# Altium PCB Head.PcbDoc
Units mm, origin at the board's own origin, x right, y up, seen from the top; angles counter-clockwise.
Board outline 61.39 x 20 mm, 2 copper layers (Top Layer, Bottom Layer); 27 components, 22 nets, 88 pads, 44 vias.
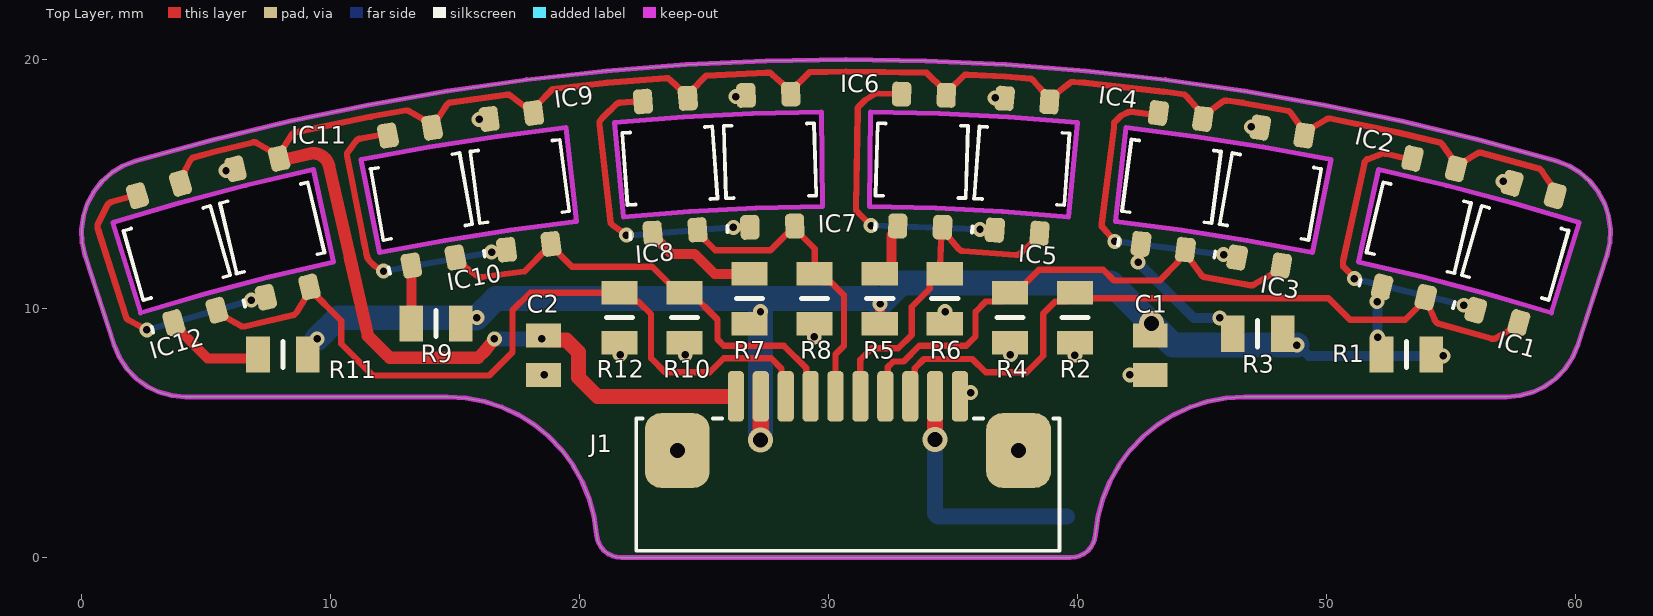
[diagram p0: Top Layer view]
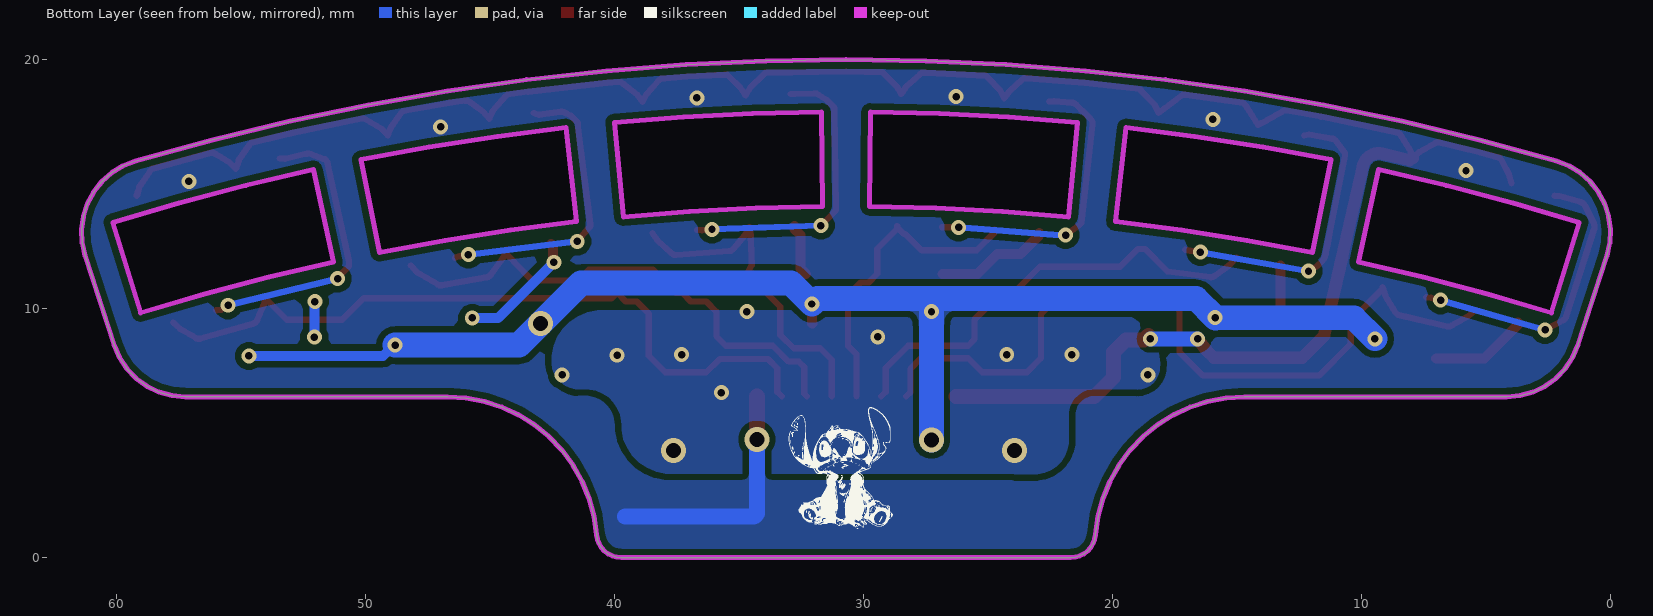
[diagram p1: Bottom Layer view, seen from below]
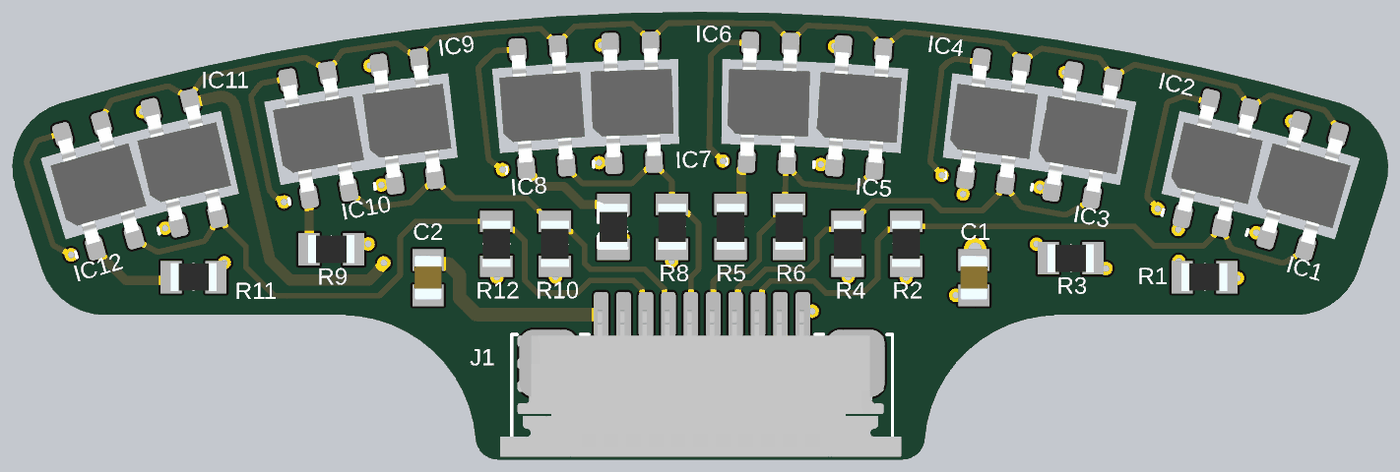
[diagram p2: 3D render of the assembled board from above, using the file's embedded part models]

## Layer stack, top to bottom
Top Solder: solder mask 0.0102, Solder Resist, Dk 3.5
Top Layer: signal copper 0.0356
Dielectric 1: dielectric 0.32, FR-4, Dk 4.8
Bottom Layer: signal copper 0.0356
Bottom Solder: solder mask 0.0102, Solder Resist, Dk 3.5

## Board outline
39.708,0 39.894,0.017 40.073,0.069 40.239,0.153 40.387,0.266 40.512,0.405 40.608,0.564 40.673,0.739 40.705,0.922 40.809,1.661 41.004,2.381 41.287,3.072 41.653,3.722 42.097,4.321 42.612,4.861 43.19,5.332 43.823,5.729 44.499,6.043 45.209,6.272 45.942,6.41 46.687,6.457 57.22,6.457 57.755,6.505 58.274,6.648 58.759,6.881 59.194,7.198 59.565,7.587 59.862,8.036 60.073,8.53 61.238,12.12 61.357,12.64 61.382,13.172 61.313,13.701 61.151,14.208 60.901,14.68 60.573,15.099 60.175,15.454 59.721,15.733 59.224,15.927 56.125,16.777 53.001,17.529 49.854,18.183 46.689,18.737 43.508,19.191 40.314,19.545 37.11,19.798 33.9,19.949 30.687,20 27.474,19.949 24.264,19.798 21.06,19.545 17.866,19.191 14.685,18.737 11.519,18.183 8.373,17.529 5.249,16.777 2.15,15.927 1.653,15.733 1.199,15.454 0.801,15.099 0.473,14.68 0.223,14.208 0.061,13.701 -0.008,13.172 0.017,12.64 0.136,12.12 1.301,8.53 1.512,8.036 1.808,7.587 2.18,7.198 2.615,6.881 3.1,6.648 3.619,6.505 4.154,6.457 14.687,6.457 15.432,6.41 16.165,6.272 16.875,6.043 17.551,5.729 18.184,5.332 18.762,4.861 19.277,4.321 19.721,3.722 20.087,3.072 20.37,2.381 20.565,1.661 20.669,0.922 20.701,0.739 20.766,0.564 20.862,0.405 20.987,0.266 21.135,0.153 21.301,0.069 21.48,0.017 21.666,0
cut-out: 11.955,12.257 11.214,15.984 13.945,16.487 16.689,16.914 19.444,17.265 19.872,13.489 17.222,13.152 14.582,12.741
cut-out: 29.708,17.895 29.746,14.095 27.075,14.032 24.407,13.895 21.744,13.683 21.391,17.467 24.159,17.686 26.932,17.829
cut-out: 10.112,11.872 7.511,11.263 4.927,10.583 2.363,9.831 1.243,13.462 3.908,14.244 6.594,14.951 9.299,15.584
cut-out: 59.011,9.831 56.447,10.583 53.863,11.263 51.262,11.872 52.075,15.584 54.78,14.951 57.465,14.244 60.131,13.462
cut-out: 31.628,14.095 31.666,17.895 34.442,17.829 37.215,17.686 39.983,17.467 39.63,13.683 36.967,13.895 34.299,14.032
cut-out: 50.16,15.984 49.419,12.257 46.792,12.741 44.152,13.152 41.502,13.489 41.93,17.265 44.685,16.914 47.429,16.487

## Design rules (kind name [scope] priority, off if disabled: settings)
Clearance Clearance_Sensors [InComponentClass('HeadSensors')] p1: gap=0.2 ignorepadtopadclearanceinfootprint=FALSE except(0.05: Arc-SMDPad Track-SMDPad)
Clearance [All] p2: gap=0.254 ignorepadtopadclearanceinfootprint=FALSE
PolygonConnect 5v [All vs IsNamedPolygon('NONET_L02_P001')] p1: thpad.connectstyle=Direct thpad.reliefconductorwidth=0.254 thpad.reliefentries=4 thpad.polygonreliefangle="90 Angle" thpad.airgapwidth=0.254 smdpad.connectstyle=Direct smdpad.reliefconductorwidth=0.254 smdpad.reliefentries=4 smdpad.polygonreliefangle="90 Angle" smdpad.airgapwidth=0.254 via.connectstyle=Relief via.reliefconductorwidth=0.254 via.reliefentries=4 via.polygonreliefangle="90 Angle" via.airgapwidth=0.254
PolygonConnect [All] p2: connectstyle=Direct reliefconductorwidth=0.254 reliefentries=4 polygonreliefangle="90 Angle" airgapwidth=0.254
RoutingVias [All] p1: holewidth=0.3 width=0.6 viastyle="Through Hole" minholewidth=0.3 minwidth=0.6 maxholewidth=0.711 maxwidth=1.27
SolderMaskExpansion [All] p1: expansion=0.102 istentingtop=FALSE
SupplyNets "Schematic Supply Nets_2" [InNet('3V3')] p1: voltage=0.000
SupplyNets "Schematic Supply Nets_1" [InNet('5V')] p2: voltage=0.000
SupplyNets "Schematic Supply Nets" [InNet('GND')] p3: voltage=0.000
Width [All] p1: maxlimit=1 minlimit=0.254 preferedwidth=0.254
30 further rules are at their usual default settings.

## Classes and differential pairs
component class HeadSensors: IC1 IC2 IC3 IC4 IC5 IC6 IC7 IC8 IC9 IC10 IC11 IC12

## Components (designator, comment, footprint, x,y, rotation, side; value= is the part's Value field where it differs from the comment)
C1 "CC0805KRX7R9BB104" CAP0805 42.901,8.128 r270 top value=100nF
C2 "CC0805KRX7R9BB104" CAP0805 18.542,8.128 r270 top value=100nF
IC1 "QRE1113GR" "SOIC4- HEAD" 57.57,12.235 r164 top locked
IC2 "QRE1113GR" "SOIC4- HEAD" 53.7,13.243 r166.7 top locked
IC3 "QRE1113GR" "SOIC4- HEAD" 47.74,14.5 r169.9 top locked
IC4 "QRE1113GR" "SOIC4- HEAD" 43.77,15.11 r172.4 top locked
IC5 "QRE1113GR" "SOIC4- HEAD" 37.76,15.73 r175.7 top locked
IC6 "QRE1113GR" "SOIC4- HEAD" 33.74,15.94 r178.3 top locked
IC7 "QRE1113GR" "SOIC4- HEAD" 27.65,15.94 r181.7 top locked
IC8 "QRE1113GR" "SOIC4- HEAD" 23.63,15.74 r184.2 top locked
IC9 "QRE1113GR" "SOIC4- HEAD" 17.6,15.11 r187.6 top locked
IC10 "QRE1113GR" "SOIC4- HEAD" 13.65,14.5 r190.2 top locked
IC11 "QRE1113GR" "SOIC4- HEAD" 7.659,13.243 r193.3 top locked
IC12 "QRE1113GR" "SOIC4- HEAD" 3.83,12.235 r196 top locked
J1 "AFA07-S10ECA-00" FPC-SMD-P1.00-10P_LCS-SJ-H2.5 30.766,5.588 r180 top locked
R1 "0805W8F1000T5E" RES0805 53.188,8.153 r180 top value=100Ω
R2 "0805W8F3301T5E" RES0805 39.878,9.636 r270 top value=3.3kΩ
R3 "0805W8F1000T5E" RES0805 47.219,8.992 r180 top value=100Ω
R4 "0805W8F3301T5E" RES0805 37.265,9.636 r270 top value=3.3kΩ
R5 "0805W8F1000T5E" RES0805 32.04,10.398 r90 top value=100Ω
R6 "0805W8F3301T5E" RES0805 34.653,10.398 r270 top value=3.3kΩ
R7 "0805W8F1000T5E" RES0805 26.815,10.398 r90 top value=100Ω
R8 "0805W8F3301T5E" RES0805 29.428,10.398 r270 top value=3.3kΩ
R9 "0805W8F1000T5E" RES0805 14.224,9.398 r180 top value=100Ω
R10 "0805W8F3301T5E" RES0805 24.203,9.636 r270 top value=3.3kΩ
R11 "0805W8F1000T5E" RES0805 8.077,8.153 r180 top value=100Ω
R12 "0805W8F3301T5E" RES0805 21.59,9.636 r270 top value=3.3kΩ

## Footprints (in the part's own frame and the unit in brackets; to place one, negate y for a bottom-side part, rotate by r counter-clockwise, add the part's x,y. Pads: shape width x height; smd on the part's side, far side on the other; paste and mask are expansions set on the pad)
CAP0805 [mm]
  rect 0.96x1.39 smd: 1(-0.79,0) 2(0.79,0)
  body extent -1,-0.63 1,0.63, height 0.95
FPC-SMD-P1.00-10P_LCS-SJ-H2.5 [mm] "Drawer Type 10P Contact,Top Horizontal attachment 1mm SMD,P=1mm,Surface Mount，Right Angle FFC, FPC (Flat Flexible) Connector Assemblies ROHS"
  rrect49% 0.65x2.032 smd: 1(-4.5,-0.889) 2(-3.5,-0.889) 3(-2.5,-0.889) 4(-1.5,-0.889) 5(-0.5,-0.889) 6(0.5,-0.889) 7(1.5,-0.889) 8(2.5,-0.889) 9(3.5,-0.889) 10(4.5,-0.889)
  rrect49% 2.601x3 smd: 11(-6.85,1.285) 12(6.85,1.285)
  silkscreen extent -8.5,0 8.5,5.31, body extent -8.89,-1.09 9.02,5.46, height 2.36
RES0805 [mm]
  rect 0.95x1.45 smd: 1(-1,0) 2(1,0)
  silkscreen extent 0,-0.53 0,0.53, body extent -1.02,-0.63 1.02,0.63, height 0.5
"SOIC4- HEAD" [mm] "Small Outline IC (SOIC), 1.80 mm pitch; 4 pin, 3.40 mm L X 2.70 mm W X 1.70 mm H body"
  rrect49% 0.77x1 smd: 1(0.9,2.65) 2(0.9,-2.65) 3(-0.9,-2.65) 4(-0.9,2.65)
  silkscreen extent -1.8,-1.45 1.82,2.82, body extent -1.8,-2.4 1.8,2.4, height 0.15

## Part data
C1 C2: "Multilayer Ceramic Capacitors MLCC - SMD/SMT 50 V 0.1uF X7R 0805 10%", LCSC=C49678, Manufacturer_Name=YAGEO, Datasheet Link=https://www.yageo.com/upload/media/product/productsearch/datasheet/mlcc/UPY-GPHC_X7R_6.3V-to-50V_20.pdf, Geometry.Height=0.95mm, Manufacturer_Part_Number=CC0805KRX7R9BB104
IC1 IC2 IC3 IC4 IC5 IC6 IC7 IC8 IC9 IC10 IC11 IC12: library part QRE1113GR_H, "IC IR-SENSOR", Ic - Collector Current Max=20mA, If - Forward Current Max=50mA, Manufacturer="ON Semiconductor", Operating Temperature="-25°C ~ 85°C", Package / Case="SMD-4 Gull Wing", Pd - Power Dissipation=75mW, Supplier Part Number 1=512-QRE1113GR, Vce - Collector/Emitter Voltage Max=30V, Vf - Forward Voltage=1.4V, Vr - Reverse Voltage=5V, Category=Phototransistor, ComponentLink1Description=Datasheet, ComponentLink1URL=https://br.mouser.com/datasheet/2/308/QRE1113_D-1814544.pdf, ComponentLink2Description="Mouser Link", ComponentLink2URL=https://br.mouser.com/ProductDetail/ON-Semiconductor-Fairchild/QRE1113GR?qs=Qb0BA3xILekkPpSVC5x7uQ%3D%3D, If - Forward Curren t(test)=20mA, Library Control - Checked Footprint=Yes, Library Control - Checked Schematic=Yes, Library Control - Last Project that Used=Follow-Final, Library Control - Last Update="24/04/2021 00:25", Library Control - Person that Checked Footprint=Lucas, Library Control - Person that Checked Schematic=Lucas, Library Control - Person that did the Last Update Footprint=Mateus(Dimas), Library Control - Person that did the Last Update Schematic=Mateus(Dimas), Library Ref=Phototransistor, Part Number=QRE1113GR, Price="1=1,150, 10=0,955, 100=0,542 (USD)", Rise Time=20us, Sensing Distance (máx)=5mm, Supplier 1=Mouser, Wavelength=940nm
J1: "Drawer Type 10P Contact,Top Horizontal attachment 1mm SMD,P=1mm,Surface Mount，Right Angle FFC, FPC (Flat Flexible) Connector Assemblies ROHS", LCSC=C262737, Manufacturer_Name=JUSHUO, Datasheet Link=https://wmsc.lcsc.com/wmsc/upload/file/pdf/v2/lcsc/2304140030_JUSHUO-AFA07-S10ECA-00_C262737.pdf, Geometry.Height=2.50mm, Manufacturer_Part_Number=AFA07-S10ECA-00
R1 R3 R5 R7 R9 R11: "125mW Thick Film Resistors 150V ±100ppm/℃ ±1% 100Ω 0805 Chip Resistor - Surface Mount ROHS", LCSC=C17408, Manufacturer_Name=UNI-ROYAL, Datasheet Link=https://wmsc.lcsc.com/wmsc/upload/file/pdf/v2/lcsc/2206010216_UNI-ROYAL-Uniroyal-Elec-0805W8F1000T5E_C17408.pdf, Geometry.Height=0.95mm, Manufacturer_Part_Number=0805W8F1000T5E
R2 R4 R6 R8 R10 R12: "125mW Thick Film Resistors 150V ±100ppm/℃ ±1% 3.3kΩ 0805 Chip Resistor - Surface Mount ROHS", LCSC=C26010, Manufacturer_Name=UNI-ROYAL, Datasheet Link=https://wmsc.lcsc.com/wmsc/upload/file/pdf/v2/lcsc/2206010045_UNI-ROYAL-Uniroyal-Elec-0805W8F3301T5E_C26010.pdf, Geometry.Height=0.95mm, Manufacturer_Part_Number=0805W8F3301T5E

## Via types
v1: diameter 0.6, hole 0.3, Top Layer to Bottom Layer, 39 vias
v2: diameter 1, hole 0.6, Top Layer to Bottom Layer, 5 vias

## Nets (pads, with @x,y where several pads share a name; then routed paths per layer and width w, separated by ;. In a path a pad name is that pad's centre, name@x,y a point inside that pad or via, vN(x,y) a via of type N, cw(c..) or ccw(c..) an arc to the next point about the centre after c; other vN are vias at no path point)
3V3: C2.1 IC1.3 IC2.3 IC3.3 IC4.3 IC5.3 IC6.3 IC7.3 IC8.3 IC9.3 IC10.3 IC11.3 IC12.3 J1.10 | length 90.9
  Top Layer w0.254: IC12.3 4.068,15.384 4.353,15.946 4.371,15.982 4.447,16.058 5.369,16.311 6.88,16.675 6.978,16.675 7.036,16.642 7.662,16.287 7.895,16.059 IC11.3 ; IC11.3@7.956,16.122 8.044,16.377 8.416,16.968 8.431,16.992 8.505,17.066 11.61,17.71 12.996,17.953 13.085,17.953 13.143,17.92 13.818,17.539 14.126,17.397 14.145,17.388 14.223,17.509 14.641,18.157 14.656,18.179 14.734,18.257 14.76,18.262 17.057,18.59 17.16,18.59 17.228,18.539 17.922,18.02 IC9.3 18.295,18.19 18.838,18.755 18.84,18.757 18.905,18.822 21.106,19.066 23.443,19.25 23.55,19.25 23.622,19.186 24.115,18.745 IC8.3 24.507,18.774 24.995,19.281 24.996,19.283 25.067,19.354 27.489,19.469 27.546,19.469 27.644,19.469 27.716,19.406 28.265,18.921 IC7.3 28.658,18.933 29.151,19.423 29.223,19.496 30.685,19.519 30.689,19.519 33.885,19.469 33.926,19.467 33.997,19.398 34.531,18.879 IC6.3 34.924,18.868 35.377,19.316 35.451,19.389 35.561,19.389 37.08,19.317 38.129,19.235 38.2,19.164 38.204,19.159 38.684,18.63 IC5.3 39.075,18.601 39.666,19.049 39.734,19.1 39.83,19.1 40.268,19.066 43.447,18.714 44.29,18.593 44.356,18.528 44.362,18.521 44.859,17.952 IC4.3 45.248,17.9 45.807,18.305 45.874,18.353 45.974,18.353 46.614,18.262 48.47,17.937 48.541,17.865 48.554,17.848 48.952,17.292 IC3.3 49.339,17.223 49.982,17.598 50.042,17.633 50.136,17.633 52.896,17.06 54.568,16.657 54.635,16.59 54.648,16.571 55.066,15.963 IC2.3 55.448,15.873 56.022,16.224 56.083,16.261 56.188,16.261 58.541,15.615 58.605,15.551 58.618,15.532 59.063,14.888 IC1.3
  Top Layer w0.5: IC11.3 8.078,15.966 9.151,16.216 cw(c9.299,15.584) 9.932,15.728 10.764,12.071 ; 10.764,12.07 cw(c10.277,11.96) 10.767,12.058 10.774,12.022 ccw(c11.955,12.257) 10.781,11.989 ccw(c11.955,12.257) 10.781,11.988 11.487,8.909 12.223,8.173 12.37,8.026 15.5,8.026 15.914,8.026 16.207,8.319 v1(16.57,8.788)
  Top Layer w0.6: C2.1 18.722,8.738 19.456,8.738 19.939,8.255 19.939,7.239 20.701,6.477 J1.10
  Bottom Layer w0.6: v1(16.57,8.788) v1(18.466,8.788)
5V: C1.1 J1.9 R1.1 R3.1 R5.1 R7.1 R9.1 R11.1 | length 55.3
  Top Layer w0.4: R5.1 ccw(c32.005,9.433) 32.055,9.433 v1(32.055,10.185)
  Top Layer w0.65: v2(27.254,4.724) 27.266,4.736 J1.9
  Bottom Layer w0.4: v1(48.793,8.534) 48.848,8.534 49.283,8.099 54.657,8.099 v1(54.661,8.103)
  Bottom Layer w1: v1(9.449,8.788) 10.295,9.635 v1(15.868,9.635) ; v1@15.853,9.627 16.64,10.414 31.826,10.414 v1(32.055,10.185) 32.893,11.024 41.326,11.024 v2(42.951,9.398) 43.815,8.534 v1(48.793,8.534) ; v2(27.254,4.724) v1(27.254,9.881)
Data1: IC1.4 IC2.4 J1.3 R2.1 | length 30
  Top Layer w0.254: J1.3 33.444,6.655 33.444,7.601 33.819,7.976 35.763,7.976 36.297,7.442 37.948,7.442 38.608,8.103 38.608,9.804 39.092,10.288 39.53,10.288 R2.1 40.1,10.414 50.063,10.414 50.927,9.55 53.145,9.55 53.966,10.372 IC2.4 54.086,10.109 54.334,9.534 ; 54.334,9.533 ccw(c54.567,9.635) 54.498,9.391 56.604,8.795 ccw(c56.673,9.04) 56.802,8.821 57.43,9.194 IC1.4
Data2: IC3.4 IC4.4 J1.4 R4.1 | length 20.7
  Top Layer w0.254: J1.4 32.365,6.576 32.365,7.657 32.582,7.874 32.995,7.874 33.63,8.509 35.509,8.509 35.89,8.89 35.89,9.881 36.298,10.288 36.917,10.288 R4.1 37.515,10.636 38.436,11.557 41.021,11.557 41.448,11.13 43.286,11.13 44.014,11.858 44.014,11.883 44.287,12.155 44.312,12.155 IC4.4 ; IC4.4@44.391,12.192 44.465,12.03 44.949,11.361 ; 44.949,11.361 ccw(c45.154,11.51) 45.11,11.26 46.911,10.941 ; 46.912,10.94 ccw(c46.955,11.191) 47.084,10.972 47.913,11.461 IC3.4
Data3: IC5.4 IC6.4 J1.5 R6.1 | length 13.7
  Top Layer w0.254: J1.5 31.266,7.945 31.728,8.407 32.791,8.407 33.325,8.941 33.325,10.07 34.055,10.8 34.055,11.05 34.403,11.398 R6.1 34.472,11.746 cw(c50.724,11.561) 34.479,12.043 34.506,12.955 IC6.4 34.748,12.947 35.212,12.4 ; 35.213,12.399 ccw(c35.406,12.564) 35.386,12.311 37.498,12.15 ; 37.499,12.15 ccw(c37.517,12.404) 37.689,12.217 38.24,12.724 IC5.4
Data4: IC7.4 IC8.4 J1.6 R8.1 | length 12.7
  Top Layer w0.254: IC8.4 24.722,13.057 25.434,12.344 27.655,12.344 28.306,12.996 28.366,12.996 IC7.4@28.628,13.258 ; IC7.4 IC7.4@28.628,13.258 ; J1.6 30.266,8.168 30.607,8.509 30.607,10.541 30.098,11.05 29.776,11.05 R8.1 29.428,12.407 28.628,13.206 IC7.4@28.628,13.258
Data5: IC9.4 IC10.4 J1.7 R10.1 | length 18.4
  Top Layer w0.254: IC10.4 15.253,11.78 15.868,11.315 ccw(c16.021,11.518) 16.053,11.265 17.765,11.489 17.782,11.506 18.672,12.396 18.973,12.396 19.685,11.684 22.905,11.684 23.953,10.636 24.453,10.636 25.527,9.562 25.527,8.763 25.781,8.509 28.194,8.509 29.088,7.615 29.088,6.655 J1.7
Data6: IC11.4 IC12.4 J1.8 R12.1 | length 32
  Top Layer w0.254: IC12.4 5.7,9.691 6.389,9.314 6.446,9.283 6.54,9.283 8.537,9.754 8.61,9.828 8.627,9.855 9.025,10.523 IC11.4 9.144,10.786 10.414,9.516 10.414,8.585 11.684,7.315 16.358,7.315 17.297,8.255 17.297,9.931 18.002,10.636 R12.1 21.938,10.288 22.351,10.288 22.86,9.779 22.86,8.001 23.419,7.442 25.222,7.442 25.781,8.001 27.686,8.001 28.099,7.588 28.099,6.644 J1.8
GND: C1.2 C2.2 J1.1 J1.11 J1.12 R2.2 R4.2 R6.2 R8.2 R10.2 R12.2
  other v1: 35.687,6.629 18.567,7.341 42.088,7.341 39.878,8.128 21.615,8.153 24.232,8.153 37.287,8.153 29.413,8.865 34.671,9.881
  other v2: 23.915,4.303 37.616,4.303
MOSFET_H: IC1.2 IC3.2 IC5.2 IC7.2 IC9.2 IC11.2 J1.2 | length 10
  Top Layer w0.65: v2(34.266,4.751) J1.2
  Bottom Layer w0.65: v2(34.266,4.751) 34.266,1.828 ccw(c34.442,1.828) 34.442,1.651 39.55,1.651
  other v1: 57.074,15.113 5.791,15.545 46.965,17.297 15.951,17.602 36.678,18.466 26.264,18.517
NetIC1_1: IC1.1 IC2.2 | length 12.1
  Top Layer w0.254: v1(51.105,11.201) 51.105,11.245 50.645,11.705 50.645,11.888 50.651,11.942 51.501,15.83 51.517,15.903 51.609,15.995 52.242,16.23 52.317,16.23 52.346,16.223 53.229,16.014 IC2.2 ; v1(55.499,10.135) 55.599,10.135 55.776,9.957 IC1.1
  Bottom Layer w0.254: v1(51.105,11.201) v1(55.499,10.135)
NetIC2_1: IC2.1 R1.2 | length 1.4
  Bottom Layer w0.4: v1(52.017,10.279) 52.028,10.269 52.028,8.864 v1(52.038,8.853)
NetIC3_1: IC3.1 IC4.2 | length 11.9
  Top Layer w0.254: v1(41.478,12.7) 41.02,13.223 40.957,13.295 40.957,13.407 41.447,17.278 41.449,17.292 41.449,17.465 41.731,17.746 41.984,17.871 42.018,17.884 cw(c42.116,17.628) 42.152,17.9 43.021,17.784 IC4.2 ; v1(45.847,12.167) 46.2,12.104 IC3.1
  Bottom Layer w0.254: v1(41.478,12.7) v1(45.847,12.167)
NetIC4_1: IC4.1 R3.2 | length 5
  Top Layer w0.4: v1(42.418,11.862) 42.456,11.9 42.456,12.531 IC4.1
  Bottom Layer w0.4: v1(42.418,11.862) 44.653,9.627 v1(45.695,9.627)
NetIC5_1: IC5.1 IC6.2 | length 11.9
  Top Layer w0.254: v1(31.699,13.335) 31.166,13.868 31.092,13.942 31.092,14.052 31.164,17.973 31.165,18.055 31.185,18.094 31.466,18.376 31.883,18.64 31.981,18.64 32.723,18.618 IC6.2 ; v1(36.068,13.183) 36.467,13.153 IC5.1
  Bottom Layer w0.254: v1(31.699,13.335) v1(36.068,13.183)
NetIC6_1: IC6.1 R5.2 | length 2.1
  Top Layer w0.4: R5.2@32.29,11.398 32.512,11.62 32.512,12.952 32.762,13.201 IC6.1
NetIC7_1: IC7.1 IC8.2 | length 12
  Top Layer w0.254: v1(21.869,12.954) 21.32,13.347 21.242,13.424 20.79,17.395 20.79,17.511 20.91,17.666 21.191,17.948 21.208,17.948 21.258,17.997 21.444,18.19 cw(c21.627,18.014) 21.609,18.268 22.341,18.321 IC8.2 ; v1(26.168,13.264) IC7.1
  Bottom Layer w0.254: v1@21.844,12.929 v1(26.168,13.264)
NetIC8_1: IC8.1 R7.2 | length 4.6
  Top Layer w0.4: IC8.1 22.926,12.947 23.672,12.202 24.603,12.202 25.407,11.398 R7.2
NetIC9_1: IC9.1 IC10.2 | length 12.1
  Top Layer w0.254: v1(12.116,11.506) 11.737,11.73 11.582,11.884 cw(c11.955,12.257) 11.438,12.154 11.428,12.205 11.342,12.637 11.23,13.203 10.648,16.131 10.648,16.24 10.698,16.308 11.008,16.726 cw(c11.212,16.574) 11.167,16.824 12.088,16.99 IC10.2 ; v1(16.459,12.268) 16.866,12.322 IC9.1
  Bottom Layer w0.254: v1(12.116,11.506) 12.119,11.506 ccw(c12.119,11.76) 12.163,11.51 v1(16.459,12.268)
NetIC10_1: IC10.1 R9.2 | length 2.3
  Top Layer w0.4: R9.2 13.239,9.413 13.239,11.727 IC10.1
NetIC11_1: IC11.1 IC12.2 | length 12
  Top Layer w0.254: 1.015,14.142 0.654,13.401 ccw(c0.883,13.29) 0.64,13.213 1.772,9.674 ccw(c2.014,9.752) 1.894,9.528 ; 1.015,14.143 cw(c1.243,14.031) 1.173,14.275 2.034,14.522 IC12.2 ; 1.895,9.527 v1(2.616,9.144) ; v1(6.807,10.338) 7.197,10.43 IC11.1
  Bottom Layer w0.254: v1(2.616,9.144) v1(6.807,10.338)
NetIC12_1: IC12.1 R11.2 | length 3.9
  Top Layer w0.4: IC12.1 3.695,9.361 5.055,8.001 R11.2@7.001,8.001

## Polygon pours and split planes (outlines as drawn)
MOSFET_H on Bottom Layer "MOSFET_H_L02_P006" (solid, pour order 6): 21.727,0 cw(c21.727,1.127) 20.93,0.33 20.909,0.351 cw(c21.473,0.914) 20.676,0.914 20.472,2.108 19.736,3.683 18.796,4.826 17.475,5.766 16.154,6.299 14.58,6.452 4.318,6.452 3.683,6.502 3.2,6.629 2.54,6.909 2.108,7.264 1.727,7.645 1.448,8.128 0.991,9.449 0.102,12.167 0,12.751 0,13.462 0.178,14.122 0.61,14.859 1.143,15.418 1.905,15.85 3.099,16.205 5.182,16.764 8.433,17.551 11.582,18.212 14.605,18.745 17.831,19.202 21.107,19.558 24.206,19.812 27.381,19.939 30.734,20.015 33.833,19.964 37.16,19.812 40.361,19.533 43.536,19.202 46.584,18.771 49.86,18.186 53.01,17.526 56.134,16.789 59.182,15.951 59.817,15.697 60.274,15.367 60.706,15.011 60.909,14.63 61.138,14.249 61.29,13.792 61.392,13.233 61.366,12.675 61.265,12.167 60.046,8.433 59.842,7.976 59.665,7.671 59.182,7.137 58.547,6.782 57.683,6.477 56.515,6.452 47.092,6.452 45.942,6.41 45.209,6.272 44.499,6.043 43.823,5.729 43.19,5.332 42.612,4.861 42.097,4.321 41.653,3.722 41.287,3.072 40.996,2.362 40.818,1.626 40.716,1.016 40.691,0.711 40.564,0.457 40.361,0.279 40.132,0.076 39.726,0 38.76,0
GND on Bottom Layer "GND_L02_P003" (solid, pour order 3): 23.927,3.353 23.114,3.353 cw(c23.114,4.724) 21.742,4.724 21.742,5.74 ccw(c20.726,5.74) 20.726,6.756 19.075,6.756 cw(c18.995,7.667) 18.085,7.587 cw(c20.299,7.718) 20.168,9.931 40.486,9.931 cw(c40.487,7.916) 42.502,7.916 cw(c41.398,7.861) 41.453,6.756 41.123,6.756 ccw(c41.123,5.334) 39.7,5.334 cw(c37.744,5.334) 37.744,3.378 24.028,3.378
5V on Bottom Layer "5V_L02_P001" (solid, pour order 1): 26.289,9.931 cw(c26.289,9.474) 26.746,9.474 26.746,9.373 ccw(c26.797,9.373) 26.797,9.322 27.762,9.322 27.762,9.423 cw(c28.27,9.423) 28.27,9.931

## Keep-outs
Keep-Out Layer:
  lines w0.2: -0.008,13.172 0.017,12.64 ; -0.008,13.172 0.061,13.701 ; -0.008,13.172 0.017,12.64 ; -0.008,13.172 0.061,13.701 ; 0.017,12.64 0.136,12.12 ; 0.017,12.64 0.136,12.12 ; 0.061,13.701 0.223,14.208 ; 0.061,13.701 0.223,14.208 ; 0.136,12.12 1.301,8.53 ; 0.136,12.12 1.301,8.53 ; 0.223,14.208 0.473,14.68 ; 0.223,14.208 0.473,14.68 ; 0.473,14.68 0.801,15.099 ; 0.473,14.68 0.801,15.099 ; 0.801,15.099 1.199,15.454 ; 0.801,15.099 1.199,15.454 ; 1.199,15.454 1.653,15.733 ; 1.199,15.454 1.653,15.733 ; 1.301,8.53 1.512,8.036 ; 1.301,8.53 1.512,8.036 ; 1.512,8.036 1.808,7.587 ; 1.512,8.036 1.808,7.587 ; 1.653,15.733 2.15,15.927 ; 1.653,15.733 2.15,15.927 ; 1.808,7.587 2.18,7.198 ; 1.808,7.587 2.18,7.198 ; 2.15,15.927 5.249,16.777 ; 2.15,15.927 5.249,16.777 ; 2.18,7.198 2.615,6.881 ; 2.18,7.198 2.615,6.881 ; 2.615,6.881 3.1,6.648 ; 2.615,6.881 3.1,6.648 ; 3.1,6.648 3.619,6.505 ; 3.1,6.648 3.619,6.505 ; 3.619,6.505 4.154,6.457 ; 3.619,6.505 4.154,6.457 ; 4.154,6.457 14.687,6.457 ; 4.154,6.457 14.687,6.457 ; 5.249,16.777 8.373,17.529 ; 5.249,16.777 8.373,17.529 ; 8.373,17.529 11.519,18.183 ; 8.373,17.529 11.519,18.183 ; 11.519,18.183 14.685,18.737 ; 11.519,18.183 14.685,18.737 ; 14.685,18.737 17.866,19.191 ; 14.685,18.737 17.866,19.191 ; 14.687,6.457 15.432,6.41 ; 14.687,6.457 15.432,6.41 ; 15.432,6.41 16.165,6.272 ; 15.432,6.41 16.165,6.272 ; 16.165,6.272 16.875,6.043 ; 16.165,6.272 16.875,6.043 ; 16.875,6.043 17.551,5.729 ; 16.875,6.043 17.551,5.729 ; 17.551,5.729 18.184,5.332 ; 17.551,5.729 18.184,5.332 ; 17.866,19.191 21.06,19.545 ; 17.866,19.191 21.06,19.545 ; 18.184,5.332 18.762,4.861 ; 18.184,5.332 18.762,4.861 ; 18.762,4.861 19.277,4.321 ; 18.762,4.861 19.277,4.321 ; 19.277,4.321 19.721,3.722 ; 19.277,4.321 19.721,3.722 ; 19.721,3.722 20.087,3.072 ; 19.721,3.722 20.087,3.072 ; 20.087,3.072 20.37,2.381 ; 20.087,3.072 20.37,2.381 ; 20.37,2.381 20.565,1.661 ; 20.37,2.381 20.565,1.661 ; 20.565,1.661 20.669,0.922 ; 20.565,1.661 20.669,0.922 ; 20.669,0.922 20.701,0.739 ; 20.669,0.922 20.701,0.739 ; 20.701,0.739 20.766,0.564 ; 20.701,0.739 20.766,0.564 ; 20.766,0.564 20.862,0.405 ; 20.766,0.564 20.862,0.405 ; 20.862,0.405 20.987,0.266 ; 20.862,0.405 20.987,0.266 ; 20.987,0.266 21.135,0.153 ; 20.987,0.266 21.135,0.153 ; 21.06,19.545 24.264,19.798 ; 21.06,19.545 24.264,19.798 ; 21.135,0.153 21.301,0.069 ; 21.135,0.153 21.301,0.069 ; 21.301,0.069 21.48,0.017 ; 21.301,0.069 21.48,0.017 ; 21.48,0.017 21.666,0 ; 21.48,0.017 21.666,0 ; 21.666,0 39.708,0 ; 21.666,0 39.708,0 ; 24.264,19.798 27.474,19.949 ; 24.264,19.798 27.474,19.949 ; 27.474,19.949 30.687,20 ; 27.474,19.949 30.687,20 ; 30.687,20 33.9,19.949 ; 30.687,20 33.9,19.949 ; 33.9,19.949 37.11,19.798 ; 33.9,19.949 37.11,19.798 ; 37.11,19.798 40.314,19.545 ; 37.11,19.798 40.314,19.545 ; 39.708,0 39.894,0.017 ; 39.708,0 39.894,0.017 ; 39.894,0.017 40.073,0.069 ; 39.894,0.017 40.073,0.069 ; 40.073,0.069 40.239,0.153 ; 40.073,0.069 40.239,0.153 ; 40.239,0.153 40.387,0.266 ; 40.239,0.153 40.387,0.266 ; 40.314,19.545 43.508,19.191 ; 40.314,19.545 43.508,19.191 ; 40.387,0.266 40.512,0.405 ; 40.387,0.266 40.512,0.405 ; 40.512,0.405 40.608,0.564 ; 40.512,0.405 40.608,0.564 ; 40.608,0.564 40.673,0.739 ; 40.608,0.564 40.673,0.739 ; 40.673,0.739 40.705,0.922 ; 40.673,0.739 40.705,0.922 ; 40.705,0.922 40.809,1.661 ; 40.705,0.922 40.809,1.661 ; 40.809,1.661 41.004,2.381 ; 40.809,1.661 41.004,2.381 ; 41.004,2.381 41.287,3.072 ; 41.004,2.381 41.287,3.072 ; 41.287,3.072 41.653,3.722 ; 41.287,3.072 41.653,3.722 ; 41.653,3.722 42.097,4.321 ; 41.653,3.722 42.097,4.321 ; 42.097,4.321 42.612,4.861 ; 42.097,4.321 42.612,4.861 ; 42.612,4.861 43.19,5.332 ; 42.612,4.861 43.19,5.332 ; 43.19,5.332 43.823,5.729 ; 43.19,5.332 43.823,5.729 ; 43.508,19.191 46.689,18.737 ; 43.508,19.191 46.689,18.737 ; 43.823,5.729 44.499,6.043 ; 43.823,5.729 44.499,6.043 ; 44.499,6.043 45.209,6.272 ; 44.499,6.043 45.209,6.272 ; 45.209,6.272 45.942,6.41 ; 45.209,6.272 45.942,6.41 ; 45.942,6.41 46.687,6.457 ; 45.942,6.41 46.687,6.457 ; 46.687,6.457 57.22,6.457 ; 46.687,6.457 57.22,6.457 ; 46.689,18.737 49.854,18.183 ; 46.689,18.737 49.854,18.183 ; 49.854,18.183 53.001,17.529 ; 49.854,18.183 53.001,17.529 ; 53.001,17.529 56.125,16.777 ; 53.001,17.529 56.125,16.777 ; 56.125,16.777 59.224,15.927 ; 56.125,16.777 59.224,15.927 ; 57.22,6.457 57.755,6.505 ; 57.22,6.457 57.755,6.505 ; 57.755,6.505 58.274,6.648 ; 57.755,6.505 58.274,6.648 ; 58.274,6.648 58.759,6.881 ; 58.274,6.648 58.759,6.881 ; 58.759,6.881 59.194,7.198 ; 58.759,6.881 59.194,7.198 ; 59.194,7.198 59.565,7.587 ; 59.194,7.198 59.565,7.587 ; 59.224,15.927 59.721,15.733 ; 59.224,15.927 59.721,15.733 ; 59.565,7.587 59.862,8.036 ; 59.565,7.587 59.862,8.036 ; 59.721,15.733 60.175,15.454 ; 59.721,15.733 60.175,15.454 ; 59.862,8.036 60.073,8.53 ; 59.862,8.036 60.073,8.53 ; 60.073,8.53 61.238,12.12 ; 60.073,8.53 61.238,12.12 ; 60.175,15.454 60.573,15.099 ; 60.175,15.454 60.573,15.099 ; 60.573,15.099 60.901,14.68 ; 60.573,15.099 60.901,14.68 ; 60.901,14.68 61.151,14.208 ; 60.901,14.68 61.151,14.208 ; 61.151,14.208 61.313,13.701 ; 61.151,14.208 61.313,13.701 ; 61.238,12.12 61.357,12.64 ; 61.238,12.12 61.357,12.64 ; 61.313,13.701 61.382,13.172 ; 61.313,13.701 61.382,13.172 ; 61.357,12.64 61.382,13.172 ; 61.357,12.64 61.382,13.172 ; 1.243,13.462 3.908,14.244 6.594,14.951 9.299,15.584 10.112,11.872 7.511,11.263 4.927,10.583 2.363,9.831 1.243,13.462 ; 11.214,15.984 13.945,16.487 16.689,16.914 19.444,17.265 19.872,13.489 17.222,13.152 14.582,12.741 11.955,12.257 11.214,15.984 ; 21.391,17.467 24.159,17.686 26.932,17.829 29.708,17.895 29.746,14.095 27.075,14.032 24.407,13.895 21.744,13.683 21.391,17.467 ; 31.628,14.095 34.299,14.032 36.967,13.895 39.63,13.683 39.983,17.467 37.215,17.686 34.442,17.829 31.666,17.895 31.628,14.095 ; 41.502,13.489 41.93,17.265 44.685,16.914 47.429,16.487 50.16,15.984 49.419,12.257 46.792,12.741 44.152,13.152 41.502,13.489 ; 51.262,11.872 52.075,15.584 54.78,14.951 57.465,14.244 60.131,13.462 59.011,9.831 56.447,10.583 53.863,11.263 51.262,11.872

## Silkscreen, mask and mechanical layers (free items; w line width, h text height)
Bottom Overlay:
  drawing of 93 lines, arcs and shapes, not listed